# Altium PCB WeeMouseA300A400.PcbDoc
Units mm, origin at the board's own origin, x right, y up, seen from the top; angles counter-clockwise.
Board outline 31.6 x 17.3 mm, 2 copper layers (Top Layer, Bottom Layer), stack 1.671 mm thick; 6 components, 13 nets, 38 pads, 28 vias.
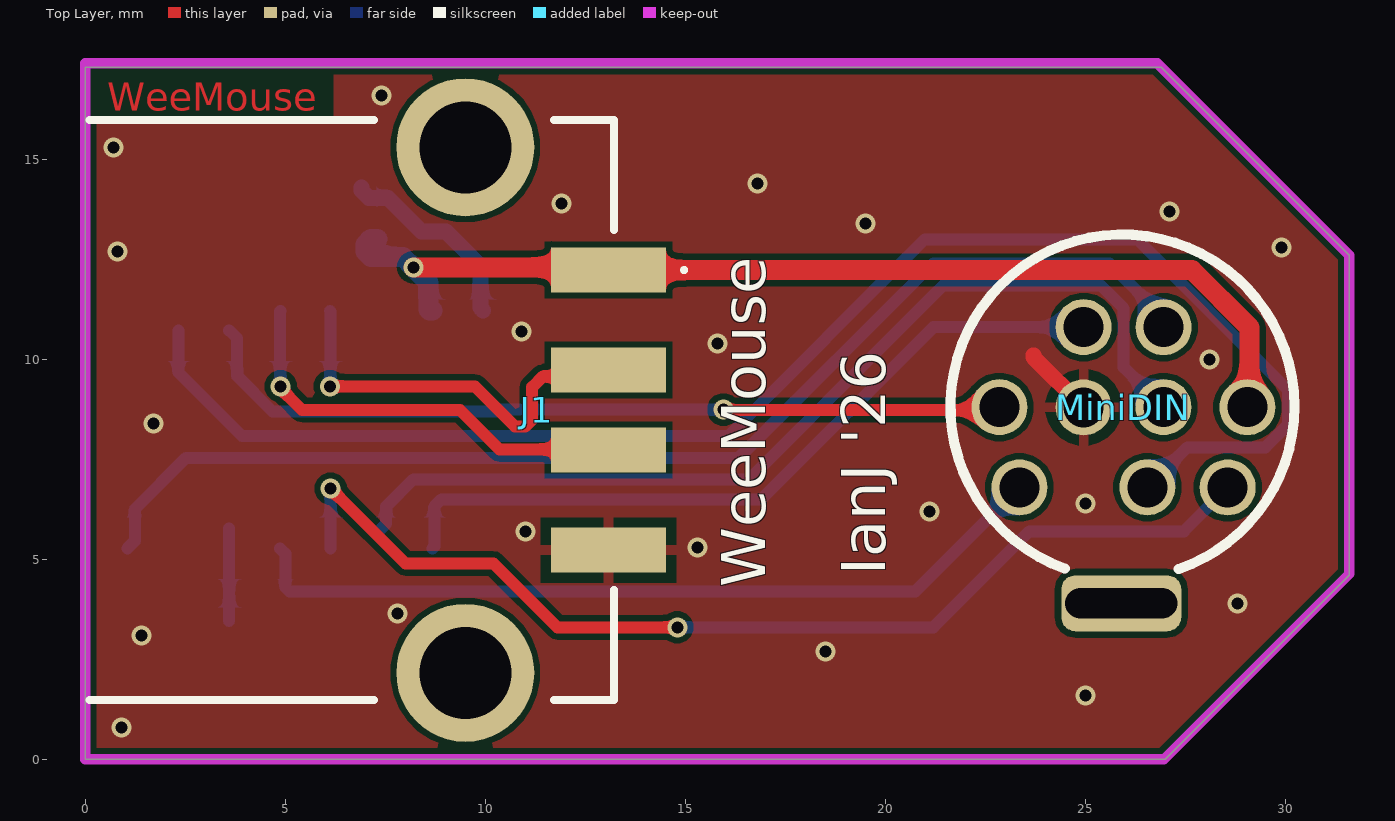
[diagram p0: Top Layer view]
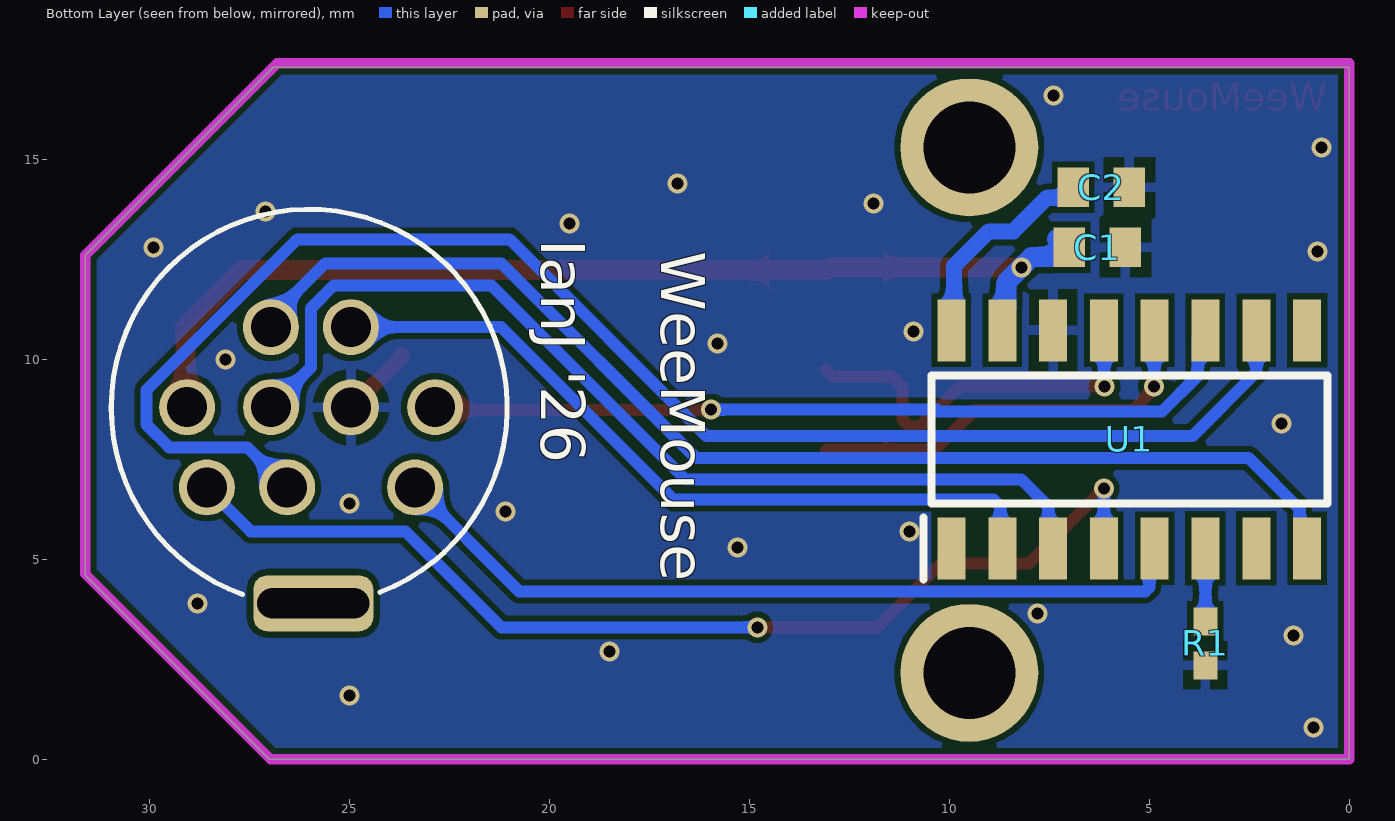
[diagram p1: Bottom Layer view, seen from below]
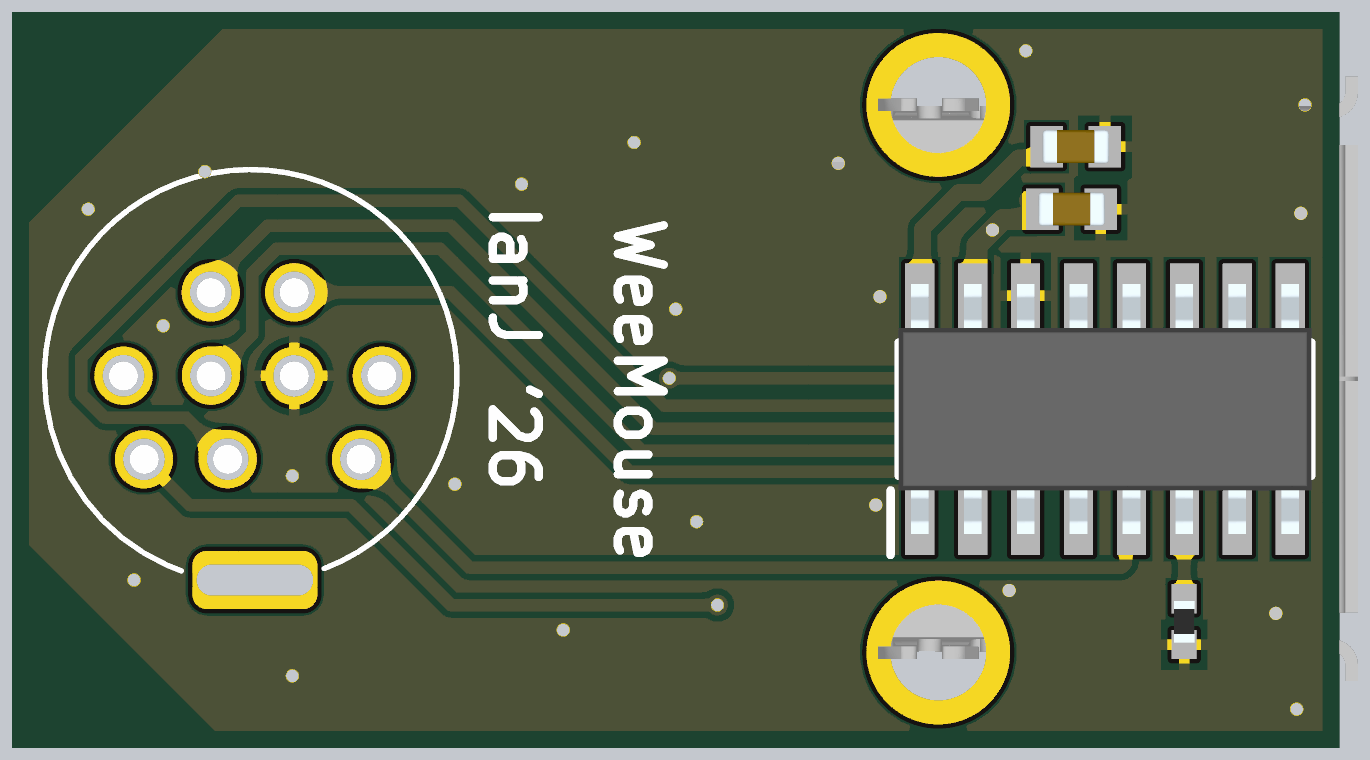
[diagram p2: 3D render of the assembled board from below, using the file's embedded part models]

## Layer stack, top to bottom
Top Solder: solder mask 0.0102, Solder Resist, Dk 3.5
Top Layer: signal copper 0.0356
Dielectric 1: dielectric 0.2, FR-4, Dk 4.8
Dielectric 2: core 1.2, PP-006, Dk 4.1
Dielectric2: dielectric 0.2, FR-4, Dk 4.8
Bottom Layer: signal copper 0.0356
Bottom Solder: solder mask 0.0102, Solder Resist, Dk 3.5

## Board outline
31.6,4.6 27,0 0,0 0,17.3 26.9,17.3 31.6,12.6

## Design rules (kind name [scope] priority, off if disabled: settings)
Clearance [All] p1: gap=0.15 ignorepadtopadclearanceinfootprint=FALSE
HoleSize [All] p1: absolutevalues=TRUE maxlimit=5 minlimit=0.025 maxpercent=80.000 minpercent=20.000
MinimumSolderMaskSliver [All] p1: minsoldermaskwidth=0.05
PolygonConnect [All] p1: connectstyle=Relief reliefconductorwidth=0.254 reliefentries=4 polygonreliefangle="90 Angle" airgapwidth=0.254
RoutingVias [All] p1: holewidth=0.711 width=1.27 viastyle="Through Hole" minholewidth=0.711 minwidth=1.27 maxholewidth=0.711 maxwidth=1.27
SilkToSolderMaskClearance [IsPad] p1 off: minsilkscreentomaskgap=0.254 clearancetoexposedcopper=TRUE
SolderMaskExpansion [All] p1: expansion=0.102 istentingtop=FALSE
SupplyNets "Schematic Supply Nets_1" [InNet('GND')] p1: voltage=0.000
SupplyNets "Schematic Supply Nets" [InNet('VCC')] p2: voltage=0.000
Width [All] p1: maxlimit=0.5 minlimit=0.254 preferedwidth=0.254
27 further rules are at their usual default settings.

## Classes and differential pairs
component class WeeMouse: C1 C2 J1 R1 U1

## Components (designator, comment, footprint, x,y, rotation, side; value= is the part's Value field where it differs from the comment)
C1 "100nF 0603" CAPC1608X90N 6.3,12.8 r180 bottom
C2 "100nF 0603" CAPC1608X90N 6.2,14.3 r0 bottom
J1 "87583-2010BLF" 875832010BLF 6.22,8.73 r270 top locked
MiniDIN "Comment" 9pinMiniDinPins 25.953,8.8 r180 top locked
R1 "0402 1K" RESC1005X40N 3.6,2.9 r90 bottom
U1 "CH544G SOIC16" SOIC127P600X175-16N 5.5,8 r90 bottom locked

## Footprints (in the part's own frame and the unit in brackets; to place one, negate y for a bottom-side part, rotate by r counter-clockwise, add the part's x,y. Pads: shape width x height; smd on the part's side, far side on the other; paste and mask are expansions set on the pad)
9pinMiniDinPins [mm]
  round 1.4 hole 1: 1(0.995,-2.004) 2(-1.005,-2.002) 3(3.1,-0.003) 4(0.994,0.002) 5(-1.002,-0.004) 6(-3.1,-0.002) 7(2.599,2.002) 8(-0.599,2) 9(-2.609,2.003)
  silkscreen extent -4.28,-4.32 4.32,4.05, body extent -3.45,-2.34 3.45,2.35
875832010BLF [mm]
  rect 1.12x2.88 smd: 1(-3.5,6.86) 2(-1,6.86) 3(1,6.86) 4(3.5,6.86)
  round 3.45 hole 2.3: MH1(-6.57,3.28) MH2(6.57,3.28)
  silkscreen extent -7.25,-6.12 7.25,8.8, body extent -7.25,-6.79 7.25,8.09, height 7.49
CAPC1608X90N [mm]
  rect 0.78x0.99 smd: 1(-0.7,0) 2(0.7,0)
  body extent -0.8,-0.41 0.8,0.41, height 0.9
RESC1005X40N [mm]
  rect 0.7x0.6 smd: 1(-0.55,0) 2(0.55,0)
  body extent -0.5,-0.25 0.5,0.25, height 0.4
SOIC127P600X175-16N [mm]
  rect 1.55x0.7 smd: 1(-2.725,4.445) 2(-2.725,3.175) 3(-2.725,1.905) 4(-2.725,0.635) 5(-2.725,-0.635) 6(-2.725,-1.905) 7(-2.725,-3.175) 8(-2.725,-4.445) 9(2.725,-4.445) 10(2.725,-3.175) 11(2.725,-1.905) 12(2.725,-0.635) 13(2.725,0.635) 14(2.725,1.905) 15(2.725,3.175) 16(2.725,4.445)
  silkscreen extent -3.5,-4.95 1.6,5.15, body extent -3,-4.95 3,4.95, height 1.75

## Part data
C1 C2: library part 06033C104KAT4A, "Capacitor", Manufacturer_Name=AVX, Mouser Part Number=581-06033C104KAT4A, Arrow Part Number=06033C104KAT4A, Arrow Price/Stock=https://www.arrow.com/en/products/06033c104kat4a/avx?region=nac, Datasheet Link=http://www.mouser.com/catalog/supplier/library/pdf/AVXSurfaceMountCeramic.pdf, Height=0.9mm, Manufacturer_Part_Number=06033C104KAT4A, Mouser Price/Stock=https://www.mouser.co.uk/ProductDetail/AVX/06033C104KAT4A?qs=8C2chATdSPiv3E9zfPZulg%3D%3D
J1: "Connector", Manufacturer_Name="Amphenol Communications Solutions", Arrow Part Number=87583-2010BLF, Arrow Price/Stock=https://www.arrow.com/en/products/87583-2010blf/amphenol-fci?region=europe, Datasheet Link=https://cdn.amphenol-cs.com/media/wysiwyg/files/drawing/87583.pdf, Height=7.94mm, Manufacturer_Part_Number=87583-2010BLF
R1: library part CRCW04021K00JNED, "Resistor", LCSC Part #=C279981, Manufacturer_Name=Vishay, Mouser Part Number=71-CRCW0402J-1.0K-E3, Arrow Part Number=CRCW04021K00JNED, Arrow Price/Stock=https://www.arrow.com/en/products/crcw04021k00jned/vishay, Datasheet Link=http://www.vishay.com/docs/20035/dcrcwe3.pdf, Height=0.4mm, Manufacturer_Part_Number=CRCW04021K00JNED, Mouser Price/Stock=https://www.mouser.co.uk/ProductDetail/Vishay-Dale/CRCW04021K00JNED?qs=YX%252BK5oaHNYpGRsHVuzxl1A%3D%3D
U1: library part CH544G, "8051 MCU with USB host", Manufacturer_Name=onsemi, Manufacturer_Part_Number=MM74HC4049M

## Free pads (board coordinates)
  rrect50% 3x1.4 hole 0.75 slot 2.8 at 0 deg: Shield(25.9,3.9)

## Via types
v1: diameter 0.5, hole 0.3, Top Layer to Bottom Layer, tented both sides, 28 vias

## Nets (pads, with @x,y where several pads share a name; then routed paths per layer and width w, separated by ;. In a path a pad name is that pad's centre, name@x,y a point inside that pad or via, vN(x,y) a via of type N, cw(c..) or ccw(c..) an arc to the next point about the centre after c; other vN are vias at no path point)
ButL: MiniDIN.2 U1.8 | length 30.1
  Bottom Layer w0.3: U1.8 1.238,5.458 1.238,6.253 2.516,7.531 16.331,7.531 21.2,12.4 25.6,12.4 26.958,11.042 MiniDIN.2
ButM: MiniDIN.3 U1.11 | length 20.7
  Top Layer w0.3: v1(15.957,8.743) 15.972,8.728 22.778,8.728 MiniDIN.3
  Bottom Layer w0.3: U1.11 3.795,10.525 3.795,9.582 4.677,8.7 10.268,8.7 10.311,8.743 v1(15.957,8.743)
ButR: MiniDIN.8 U1.10 | length 38.1
  Bottom Layer w0.3: U1.10 2.325,9.675 3.92,8.08 16.07,8.08 20.991,13 26.3,13 30.071,9.229 30.071,8.369 29.502,7.8 27.551,7.8 MiniDIN.8
GND: C1.2 C2.1 J1.4 MiniDIN.4 R1.1 U1.14 | length 1.8
  Top Layer w0.4: 23.7,10.1 23.7,10.056 MiniDIN.4
  other v1: 0.9,0.8 25,1.6 18.5,2.7 1.4,3.1 7.8,3.65 28.8,3.9 15.3,5.3 11,5.7 21.1,6.2 25,6.4 1.7,8.4 28.1,10 15.8,10.4 10.9,10.7 0.8,12.7 29.9,12.8 19.5,13.4 27.1,13.7 11.9,13.9 16.8,14.4 0.7,15.3 7.4,16.6
Reset: R1.2 U1.6 | length 2.3
  Bottom Layer w0.3: R1.2@3.595,3.455 U1.6@3.595,5.775
UDM: J1.2 U1.13 | length 10.3
  Top Layer w0.3: v1(6.118,9.322) 9.74,9.322 10.746,8.316 10.994,8.316 11.17,8.492 11.17,9.303 11.437,9.57 12.92,9.57 J1.2
  Bottom Layer w0.3: v1(6.118,9.322) 6.126,9.33 6.126,11.199 U1.13@6.118,11.208
UDP: J1.3 U1.12 | length 10.8
  Top Layer w0.3: v1(4.882,9.322) 4.882,9.268 5.421,8.729 9.371,8.729 10.35,7.75 13.06,7.75 J1.3
  Bottom Layer w0.3: v1(4.882,9.322) 4.874,9.33 4.874,11.199 U1.12@4.882,11.208
V33: C2.2 U1.16 | length 5
  Bottom Layer w0.4: C2.2 6.9,14.223 7.09,14.033 7.567,14.033 8.4,13.2 9.012,13.2 9.879,12.333 9.879,11.291 U1.16@9.945,11.225
VCC: C1.1 J1.1 MiniDIN.6 U1.15 | length 26.7
  Top Layer w0.5: v1(8.2,12.3) 13.01,12.3 J1.1 27.67,12.23 29.1,10.8 MiniDIN.6@29.1,8.798
  Bottom Layer w0.5: C1.1@7.311,13.011 7.14,13.011 7,12.871 7,12.695 7.14,12.555 7.945,12.555 v1(8.2,12.3) 8.575,11.925 8.575,11.25 8.6,11.225 U1.15@8.675,11.225
X1: MiniDIN.5 U1.3 | length 24.4
  Bottom Layer w0.3: U1.3@7.405,5.775 7.523,5.893 7.523,6.318 8.202,6.997 16.597,6.997 21.447,11.847 25.385,11.847 25.958,11.274 25.958,9.801 MiniDIN.5
X2: MiniDIN.1 U1.2 | length 19.2
  Bottom Layer w0.3: U1.2 8.724,5.324 8.724,6.324 8.9,6.5 16.9,6.5 21.204,10.804 MiniDIN.1
Y1: MiniDIN.9 U1.4 | length 26.8
  Top Layer w0.3: v1(6.135,6.765) 8,4.9 10.2,4.9 11.8,3.3 v1(14.8,3.3)
  Bottom Layer w0.3: U1.4 v1(6.135,6.765) ; v1(14.8,3.3) 21.2,3.3 23.6,5.7 27.464,5.7 MiniDIN.9
Y2: MiniDIN.7 U1.5 | length 20.5
  Bottom Layer w0.3: U1.5 5.001,5.139 5.001,4.299 5.1,4.2 20.756,4.2 MiniDIN.7
pads on no net: J1.MH1 J1.MH2 U1.1 U1.7 U1.9

## Polygon pours and split planes (outlines as drawn)
GND on Bottom Layer "NONET_L-01_P-001" (solid, remove dead copper, pour order 1): 0.189,0 31.6,0 31.6,17.3 0.137,17.3
GND on Top Layer "NONET_L-01_P-001" (solid, remove dead copper, pour order 0): 0.189,0 31.6,0 31.6,17.3 0.136,17.3

## Keep-outs
Keep-Out Layer:
  lines w0.254: 0,0 26.968,0 31.6,4.632 31.6,12.6 26.8,17.4 0,17.4 0,0

## Other copper
Top Layer:
  text "WeeMouse" at 0.55,16.207 h0.7

## Silkscreen, mask and mechanical layers (free items; w line width, h text height)
Top Overlay:
  text "IanJ '26" at 20,4.6 h1.1 r90
  text "WeeMouse" at 17,4.3 h1.1 r90
Bottom Overlay:
  lines w0.127: 24.235,4.175 cw(c26,8.8) 30.95,8.8 ; 27.665,4.12 ccw(c26,8.781) 30.95,8.781
  text "IanJ '26" at 20.2,13 h1.1 r90
  text "WeeMouse" at 17.2,12.7 h1.1 r90
Board Shape:
  lines w0.254: 0,0 26.968,0 31.6,4.632 31.6,12.6 26.8,17.4 0,17.4 0,0